# Altium PCB bbr18_wheel_motor_connector_board.PcbDoc
Units mm, origin at the board's own origin, x right, y up, seen from the top; angles counter-clockwise.
Board outline 28 x 12 mm, 2 copper layers (Top Layer, Bottom Layer), stack 1.571 mm thick; 6 components, 3 nets, 8 pads, 36 vias.
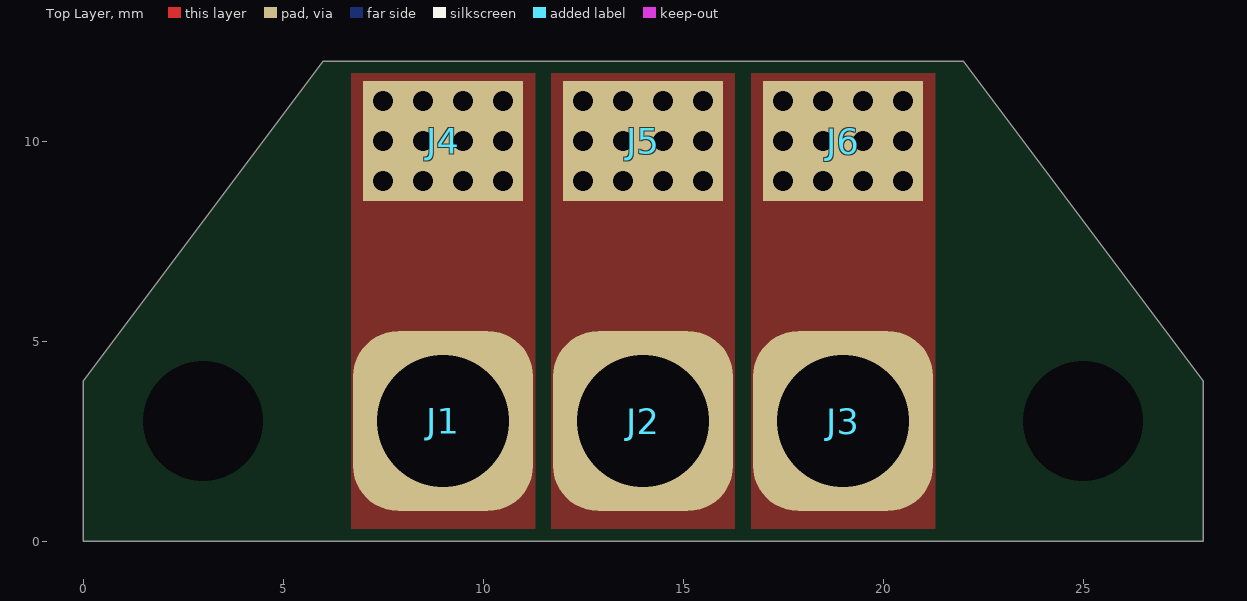
[diagram p0: Top Layer view]
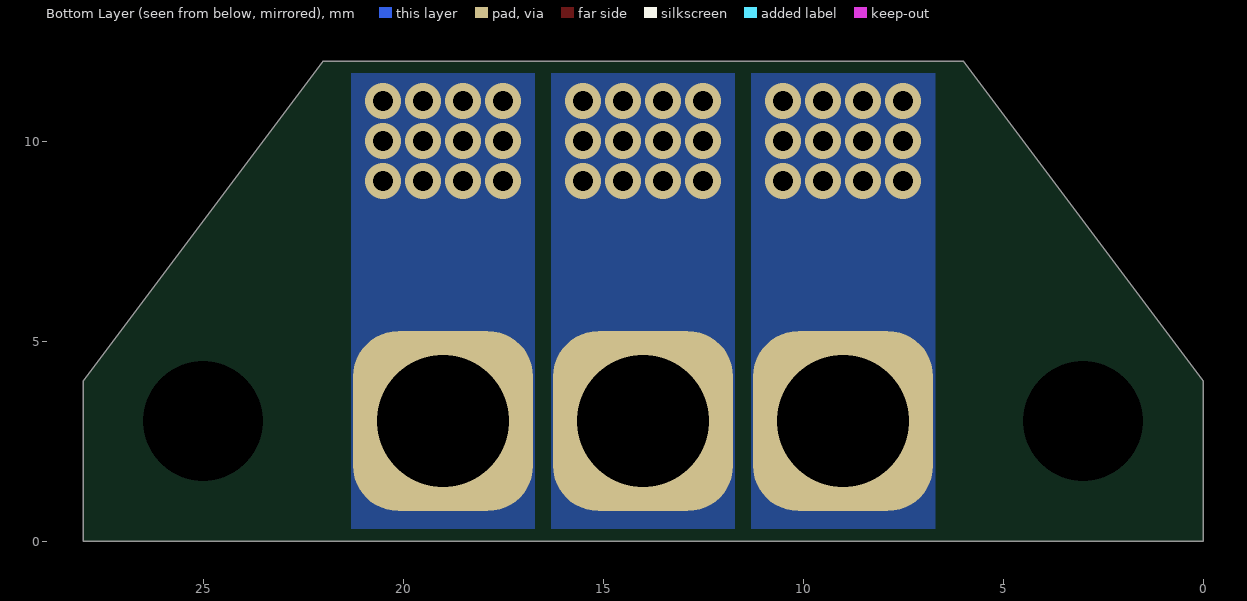
[diagram p1: Bottom Layer view, seen from below]

## Layer stack, top to bottom
Top Solder: solder mask 0.0102, Solder Resist, Dk 3.5
Top Layer: signal copper 0.0356
Dielectric 1: dielectric 1.5, FR-4, Dk 4.8
Bottom Layer: signal copper 0.0356
Bottom Solder: solder mask 0.0102, Solder Resist, Dk 3.5

## Board outline
0,0 28,0 28,4 22,12 6,12 0,4

## Design rules (kind name [scope] priority, off if disabled: settings)
BoardOutlineClearance [All] p1: gap=0.3 ignorepadtopadclearanceinfootprint=FALSE except(0: Arc-SplitContinuation Track-SplitContinuation SMDPad-SplitContinuation THPad-SplitContinuation Via-SplitContinuation Fill-SplitContinuation Poly-SplitContinuation Region-SplitContinuation Text-SplitContinuation)
Clearance [All] p1: gap=0.4 ignorepadtopadclearanceinfootprint=FALSE except(0: Arc-Hole Track-Hole SMDPad-Hole THPad-Hole Via-Hole Fill-Hole Poly-Hole Region-Hole Text-Hole)
PolygonConnect [All] p1: connectstyle=Direct reliefconductorwidth=0.254 reliefentries=4 polygonreliefangle="90 Angle" airgapwidth=0.254
RoomDefinition bbr18_wheel_motor_connector_board [InComponentClass('bbr18_wheel_motor_connector_board')] p1: confinementstyle=ConfineIn formatcopy=TRUE lockcomponents=FALSE outline -2,-1 31,-1 31,14 -2,14
RoutingVias [All] p1: holewidth=0.5 width=0.9 viastyle="Through Hole" minholewidth=0.3 minwidth=0.6 maxholewidth=3 maxwidth=5
SolderMaskExpansion SolderMaskExpansionVia [IsVia] p1: expansion=-5
SolderMaskExpansion [All] p2: expansion=0.102
Width [All] p1: maxlimit=10 minlimit=0.2 preferedwidth=0.3
30 further rules are at their usual default settings.

## Components (designator, comment, footprint, x,y, rotation, side; value= is the part's Value field where it differs from the comment)
J1 "HEADER-1" 2MM-BULLET-PLUG-VIA 9,3 r0 top
J2 "HEADER-1" 2MM-BULLET-PLUG-VIA 14,3 r0 top
J3 "HEADER-1" 2MM-BULLET-PLUG-VIA 19,3 r0 top
J4 "HEADER-1" POWER-PAD-4x3 9,10 r0 top
J5 "HEADER-1" POWER-PAD-4x3 14,10 r0 top
J6 "HEADER-1" POWER-PAD-4x3 19,10 r0 top

## Footprints (in the part's own frame and the unit in brackets; to place one, negate y for a bottom-side part, rotate by r counter-clockwise, add the part's x,y. Pads: shape width x height; smd on the part's side, far side on the other; paste and mask are expansions set on the pad)
2MM-BULLET-PLUG-VIA [mm]
  rrect50% 4.5x4.5 hole 3.3: 1(0,0)
POWER-PAD-4x3 [mm]
  rect 4x3 smd: 1(0,0)

## Free pads (board coordinates)
  round 0 hole 3 unplated: 9(3,3) 10(25,3)

## Via types
v1: diameter 0.9, hole 0.5, Top Layer to Bottom Layer, 36 vias

## Nets (pads, with @x,y where several pads share a name; then routed paths per layer and width w, separated by ;. In a path a pad name is that pad's centre, name@x,y a point inside that pad or via, vN(x,y) a via of type N, cw(c..) or ccw(c..) an arc to the next point about the centre after c; other vN are vias at no path point)
NetJ1_1: J1.1 J4.1
  other v1: 7.5,9 8.5,9 9.5,9 10.5,9 7.5,10 8.5,10 9.5,10 10.5,10 7.5,11 8.5,11 9.5,11 10.5,11
NetJ2_1: J2.1 J5.1
  other v1: 12.5,9 13.5,9 14.5,9 15.5,9 12.5,10 13.5,10 14.5,10 15.5,10 12.5,11 13.5,11 14.5,11 15.5,11
NetJ3_1: J3.1 J6.1
  other v1: 17.5,9 18.5,9 19.5,9 20.5,9 17.5,10 18.5,10 19.5,10 20.5,10 17.5,11 18.5,11 19.5,11 20.5,11

## Polygon pours and split planes (outlines as drawn)
NetJ2_1 on Top Layer "NETJ2_1_L01_P012" (solid, remove dead copper, pour order 12): 11.7,0 16.3,0 16.3,12 11.7,12
NetJ1_1 on Top Layer "NETJ1_1_L01_P010" (solid, remove dead copper, pour order 10): 6.7,0 6.7,12 11.3,12 11.3,0
NetJ3_1 on Top Layer "NETJ3_1_L01_P002" (solid, remove dead copper, pour order 2): 16.7,0 21.3,0 21.3,12 16.7,12
NetJ3_1 on Bottom Layer "NETJ3_1_L02_P008" (solid, remove dead copper, pour order 8): 16.7,0 21.3,0 21.3,12 16.7,12
NetJ2_1 on Bottom Layer "NETJ2_1_L02_P006" (solid, remove dead copper, pour order 6): 11.7,0 11.7,12 16.3,12 16.3,0
NetJ1_1 on Bottom Layer "NETJ1_1_L02_P004" (solid, remove dead copper, pour order 4): 6.7,0 6.7,12 11.3,12 11.3,0

## Silkscreen, mask and mechanical layers (free items; w line width, h text height)
Mechanical 1:
  the board outline again, w0.1